# EAGLE board UTN-ESEXT01 (EAGLE 8.3.1)
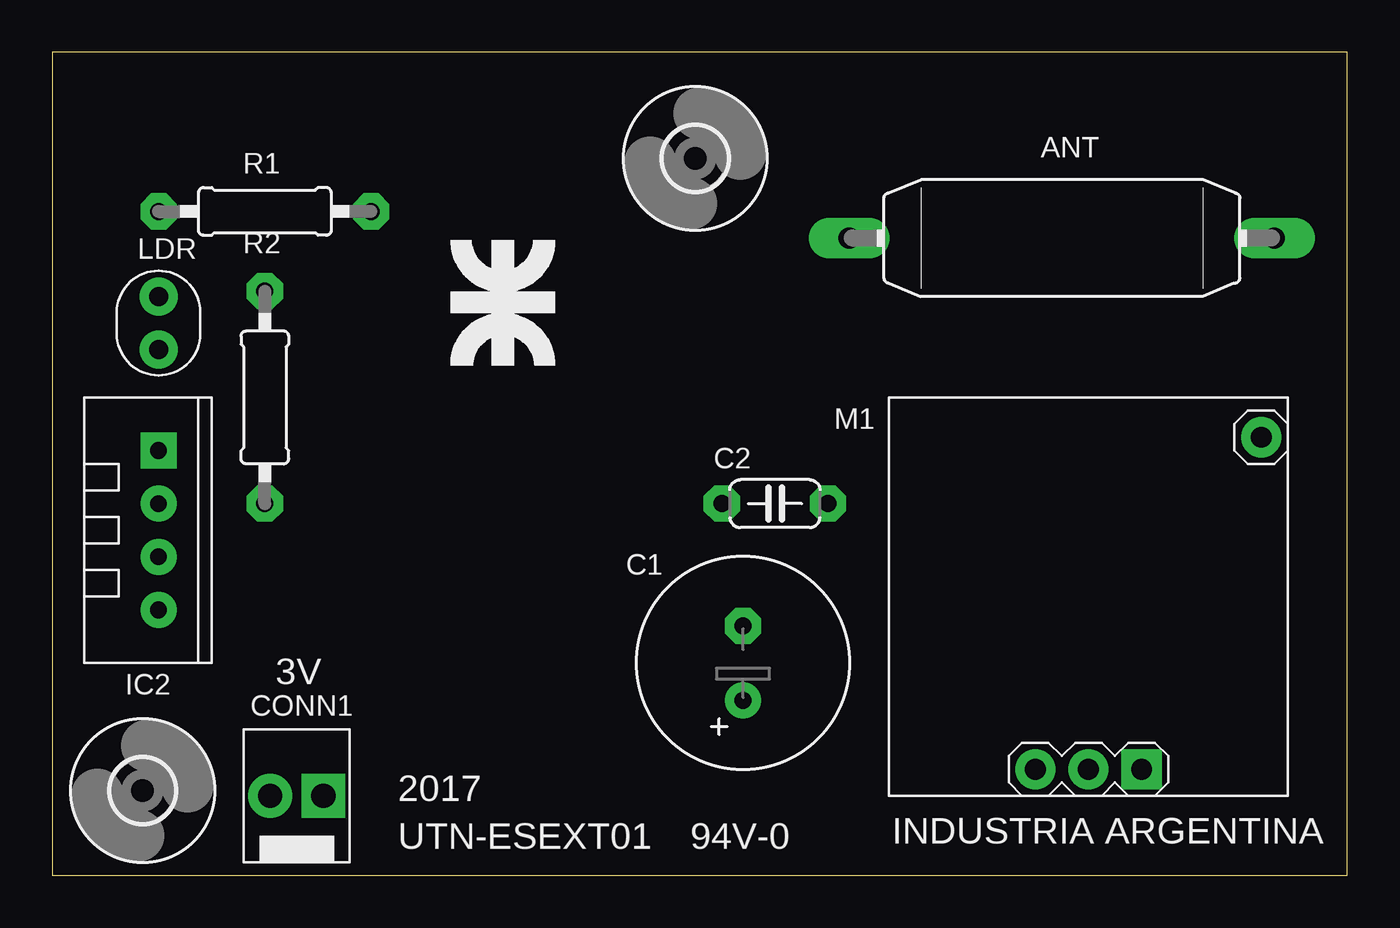
[diagram p0: board, top side]
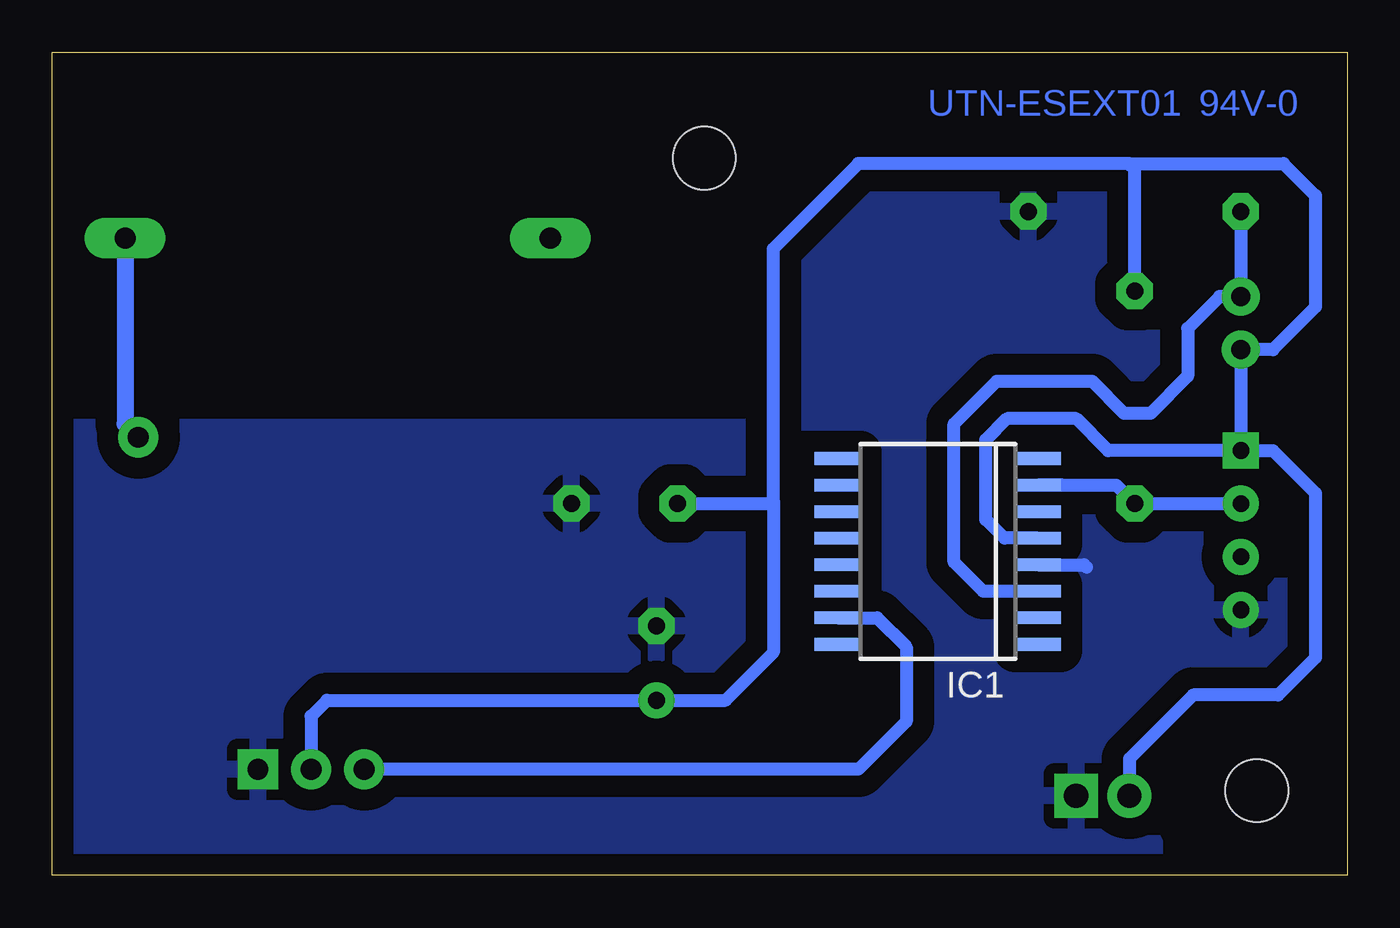
[diagram p1: board, bottom side, seen from below]

Size 61.9 x 39.36 mm. Coordinates in mm from the lower left corner, seen from the top.
Outline: 0,0 61.9,0 61.9,39.36 0,39.36 0,0
Copper layers (1*16): Top 0.035mm / dielectric 1.5mm / Bottom 0.035mm
Design rules "default *": minimum track width 6mil, minimum drill 0.35mm, track to track 6mil, track to pad 6mil, pad to pad 6mil, via to via 6mil, smd to smd 6mil, copper to edge 40mil, drill to drill 6mil, minimum pad ring 18mil, minimum via ring 8mil, stop-mask expansion 4mil, vias tented up to drill 0mil, thermal gap 20mil
bRestrict: area 29.2,22.9 to 61,38.1

## Footprints (pad centres in the part's own frame; a part is rotated, then mirrored left to right if it is on the bottom)
SMSC20 = drill 1.016 long: 1 -10.16,0; 2 10.16,0
E3,5-10 = drill 0.813 pad 1.6: + -1.778,0 | drill 0.813 pad 1.6 octagon: - 1.778,0
C050-024X044 = drill 0.813 octagon: 1 -2.54,0; 2 2.54,0
KK-V-2-SQ = drill 1.168 square: 1 0,1.27 | drill 1.168: 2 0,-1.27
SOIC16R = smd 0.6 x 2.2: 1 -4.445,-4.775; 2 -3.175,-4.775; 3 -1.905,-4.775; 4 -0.635,-4.775; 5 0.635,-4.775; 6 1.905,-4.775; 7 3.175,-4.775; 8 4.445,-4.775; 9 4.445,4.8; 10 3.175,4.8; 11 1.905,4.8; 12 0.635,4.8; 13 -0.635,4.8; 14 -1.905,4.8; 15 -3.175,4.8; 16 -4.445,4.8
TEMP-HUM-SENSOR-DHT11 = drill 0.8 square: 1 -3.81,0 | drill 0.8: 2 -1.27,0; 3 1.27,0; 4 3.81,0
ON_BOARD = drill 0.9: 1 -1.27,0; 2 1.27,0
WIRELESS-XY-FST = drill 1 square: 1 2.54,-8.89 | drill 1: 2 0,-8.89; 3 -2.54,-8.89; ANT 8.255,6.985
0207/10 = drill 0.813 octagon: 1 -5.08,0; 2 5.08,0
3,0 = hole 3: 0,0

## Placement (x,y rotation side)
ANT  433 HELIX  [SMSC20]  48.26,30.48 0 top
C1  470u  [E3,5-10]  33.02,10.16 90 top
C2  100n  [C050-024X044]  34.54,17.78 0 top
CONN1  KK2VSQ  [KK-V-2-SQ]  11.68,3.81 270 top
IC1  C8051F832  [SOIC16R]  19.56,15.49 90 bottom
IC2  DHT11  [TEMP-HUM-SENSOR-DHT11]  5.08,16.51 270 top
LDR  10k  [ON_BOARD]  5.08,26.42 270 top
M1  433.92 ASK  [WIRELESS-XY-FST]  49.53,13.97 0 top
R1  10k  [0207/10]  10.16,31.75 180 top
R2  10k  [0207/10]  10.16,22.86 90 top
U$1  [3,0]  30.73,34.29 0 top
U$2  [3,0]  4.32,4.06 0 top
U$3  UTN_LOGO  [UTN_LOGO]  19.05,24.38 0 top

## Library data of the parts
ANT = inductors
C1 C2 R1 R2 = rcl
CONN1 = molex-kk
IC1 = silabs-2
IC2 M1 = diy-modules
LDR = LDR
U$1 U$2 = holes
U$3 = UTN_LOGO

## Nets
DHT: IC1.7 IC2.2 R2.1
GND: C1.- C2.2 CONN1.1 IC1.4 IC2.4 M1.1 R1.1
LDR: IC1.3 LDR.1 R1.2
N$1: ANT.2 M1.ANT
TX: IC1.15 M1.3
VDD: C1.+ C2.1 CONN1.2 IC1.5 IC2.1 LDR.2 M1.2 R2.2

## Tracks (layer width: path | path; a pad name or v marks a point on that pad's centre or on a via)
DHT
  Bottom 0.61: IC2.2 R2.1 11.05,18.67 IC1.7 13.59,18.67
GND
  Bottom 0.61: IC1.4 12.57,14.86 12.45,14.73
  pour Bottom (isolate 1.016, rank 4): 0,39.37 0,0 62.23,0 62.23,39.37
LDR
  Bottom 0.61: R1.2 LDR.1 6.1,27.69 7.62,26.16 7.62,23.88 9.4,22.1 10.67,22.1 12.19,23.62 16.76,23.62 18.8,21.59 18.8,14.99 17.4,13.59 IC1.3
N$1
  Bottom 0.813: ANT.2 58.42,21.59 M1.ANT
TX
  Bottom 0.61: IC1.15 22.48,12.32 21.08,10.92 21.08,7.37 23.37,5.08 M1.3
VDD
  Bottom 0.61: IC2.1 LDR.2 3.56,25.15 1.52,27.18 1.52,32.51 3.05,34.04 10.43,34.04 | M1.2 49.53,7.62 48.77,8.38 C1.+ 29.72,8.38 27.43,10.67 27.43,17.94 | IC2.1 3.56,20.32 1.52,18.29 1.52,10.41 3.3,8.64 7.37,8.64 10.41,5.59 CONN1.2 | IC2.1 11.43,20.32 12.95,21.84 16.26,21.84 17.27,20.83 17.27,17.02 16.38,16.13 IC1.5 | 27.43,17.94 27.43,29.97 23.37,34.04 10.43,34.04 | R2.2 10.16,33.76 10.43,34.04 | C2.1 27.59,17.78 27.43,17.94

## Text on the board
Bottom: 94V-0 | UTN-ESEXT01
tNames: 3V | 2017 | INDUSTRIA ARGENTINA | UTN-ESEXT01 | 94V-0